# EAGLE board LPF Schematic (EAGLE 9.6.1)
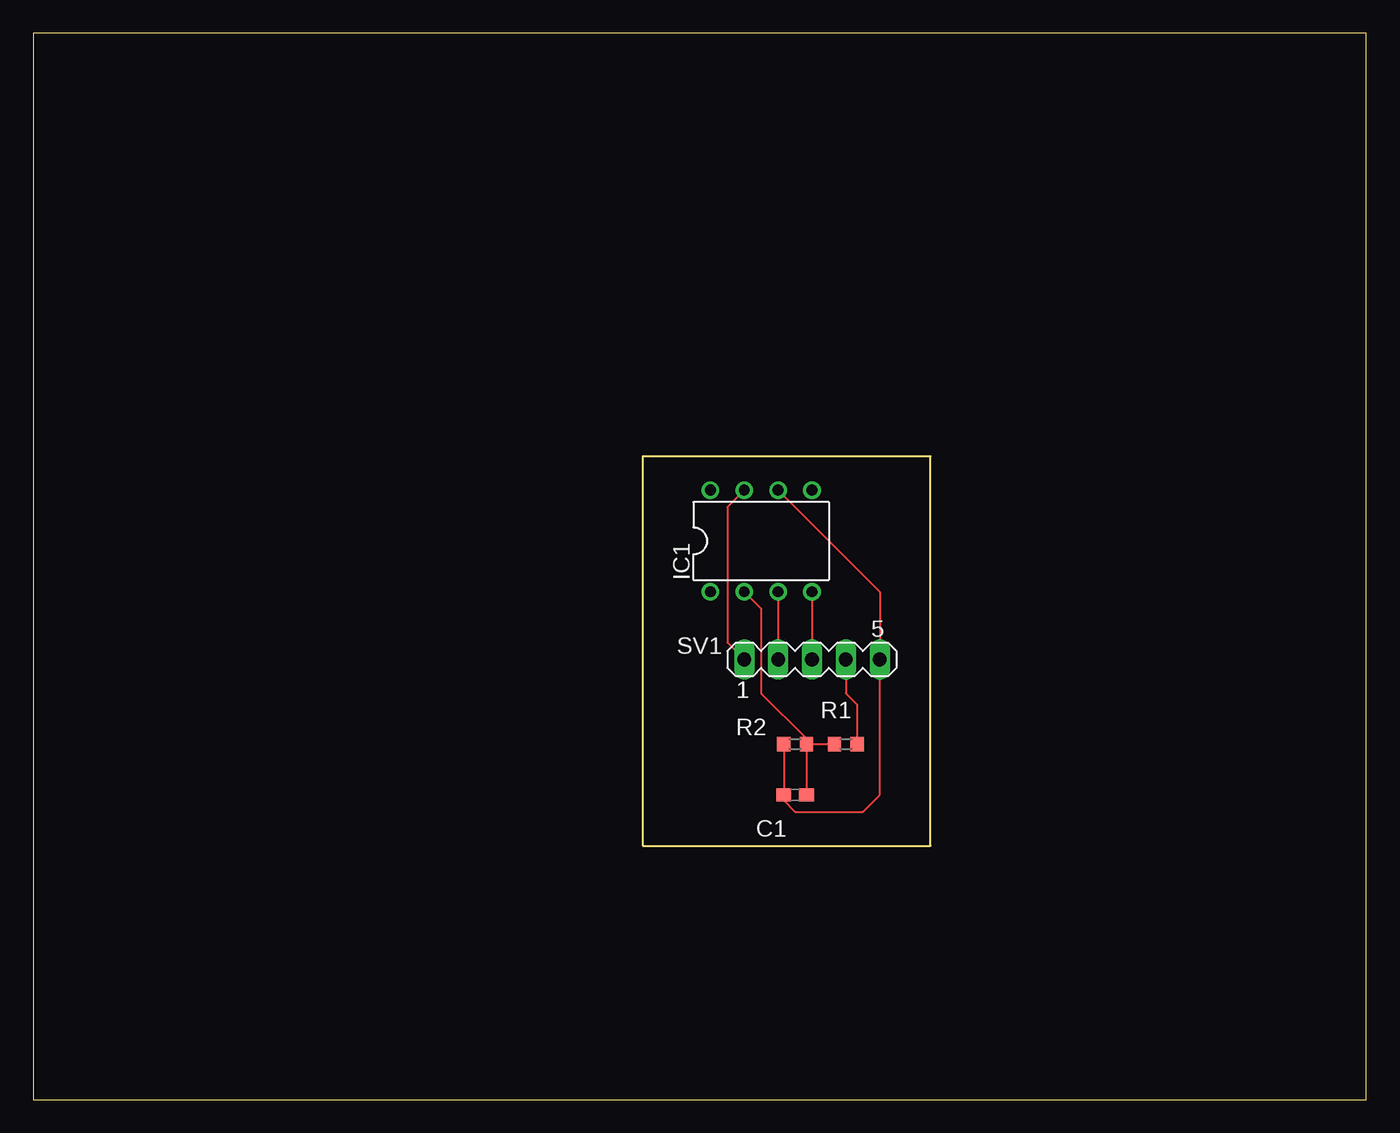
[diagram p0: board, top side]

Size 100 x 80 mm. Coordinates in mm from the lower left corner, seen from the top.
Outline: 0,0 100,0 100,80 0,80 0,0
Outline: 45.72,19.05 67.31,19.05 67.31,48.26 45.72,48.26 45.72,19.05
Copper layers (1*16): Top 0.035mm / dielectric 1.5mm / Bottom 0.035mm
Design rules "default": minimum track width 6mil, minimum drill 0.35mm, track to track 6mil, track to pad 6mil, pad to pad 6mil, via to via 6mil, smd to smd 6mil, copper to edge 40mil, drill to drill 6mil, minimum pad ring 10mil, minimum via ring 8mil, stop-mask expansion 4mil, vias tented up to drill 0mil, thermal gap 10mil

## Footprints (pad centres in the part's own frame; a part is rotated, then mirrored left to right if it is on the bottom)
C0603 = smd 1.1 x 1: 1 -0.85,0; 2 0.85,0
DIL08 = drill 0.813 pad 1.27: 1 -3.81,-3.81; 2 -1.27,-3.81; 3 1.27,-3.81; 4 3.81,-3.81; 5 3.81,3.81; 6 1.27,3.81; 7 -1.27,3.81; 8 -3.81,3.81
R0603 = smd 1 x 1.1: 1 -0.85,0; 2 0.85,0
MA05-1 = drill 1.016 long: 1 -5.08,0; 2 -2.54,0; 3 0,0; 4 2.54,0; 5 5.08,0

## Placement (x,y rotation side)
C1  2uF  [C0603]  57.15,22.86 180 top
IC1  LM741P  [DIL08]  54.61,41.91 0 top
R1  1k  [R0603]  60.96,26.67 0 top
R2  10k  [R0603]  57.15,26.67 0 top
SV1  [MA05-1]  58.42,33.02 0 top

## Library data of the parts
C1 = rcl; SPICEPREFIX: C
IC1 = linear
R1 R2 = rcl; SPICEPREFIX: R
SV1 = con-lstb; OC_FARNELL: unknown; OC_NEWARK: unknown

## Nets
+15V: IC1.7 SV1.1
-15V: IC1.4 SV1.3
GND: IC1.3 SV1.2
N$1: C1.1 IC1.2 R1.1 R2.2
N$2: R1.2 SV1.4
N$3: C1.2 IC1.6 R2.1 SV1.5

## Tracks (layer width: path | path; a pad name or v marks a point on that pad's centre or on a via)
+15V
  Top 0.152: IC1.7 52.07,44.45 52.07,34.29 SV1.1
-15V
  Top 0.152: IC1.4 SV1.3
GND
  Top 0.152: IC1.3 SV1.2
N$1
  Top 0.152: IC1.2 54.61,36.83 54.61,30.48 58,27.09 R2.2 | R2.2 R1.1 | R2.2 C1.1
N$2
  Top 0.152: SV1.4 60.96,30.48 61.81,29.63 R1.2
N$3
  Top 0.152: IC1.6 63.5,38.1 SV1.5 63.5,22.86 62.23,21.59 57.15,21.59 56.3,22.44 C1.2 R2.1